# EAGLE board MotorControl (EAGLE 9.6.2), part 1 of 2
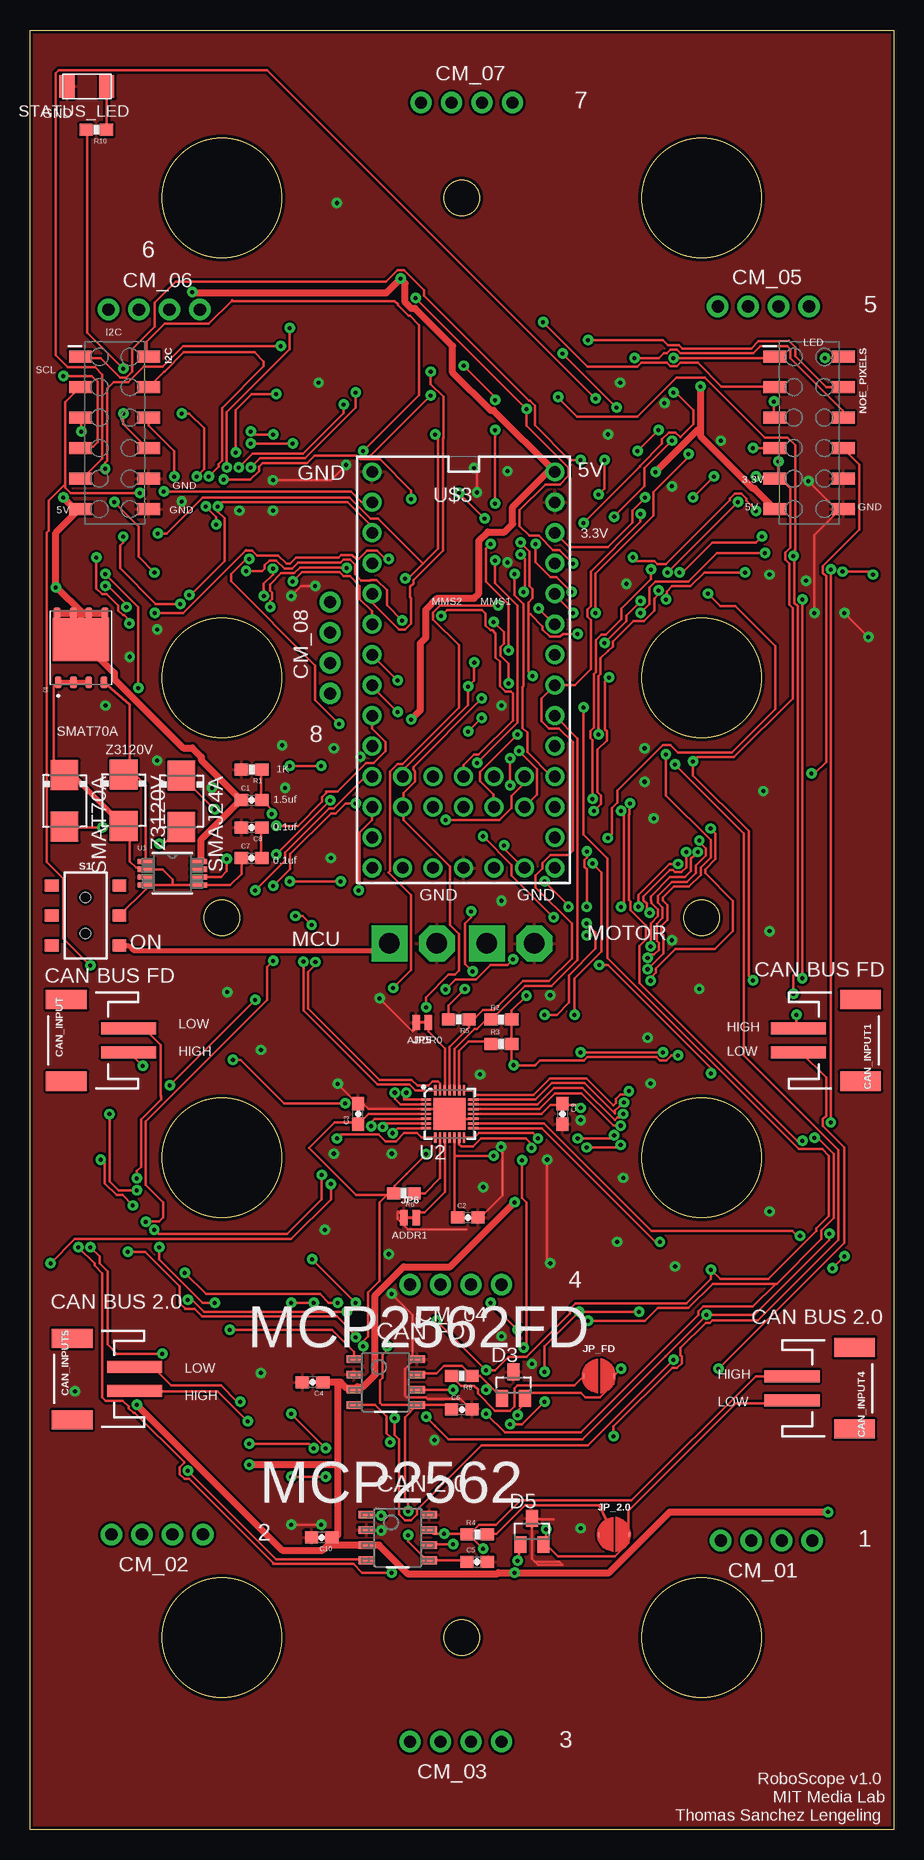
[diagram p0: board, top side]
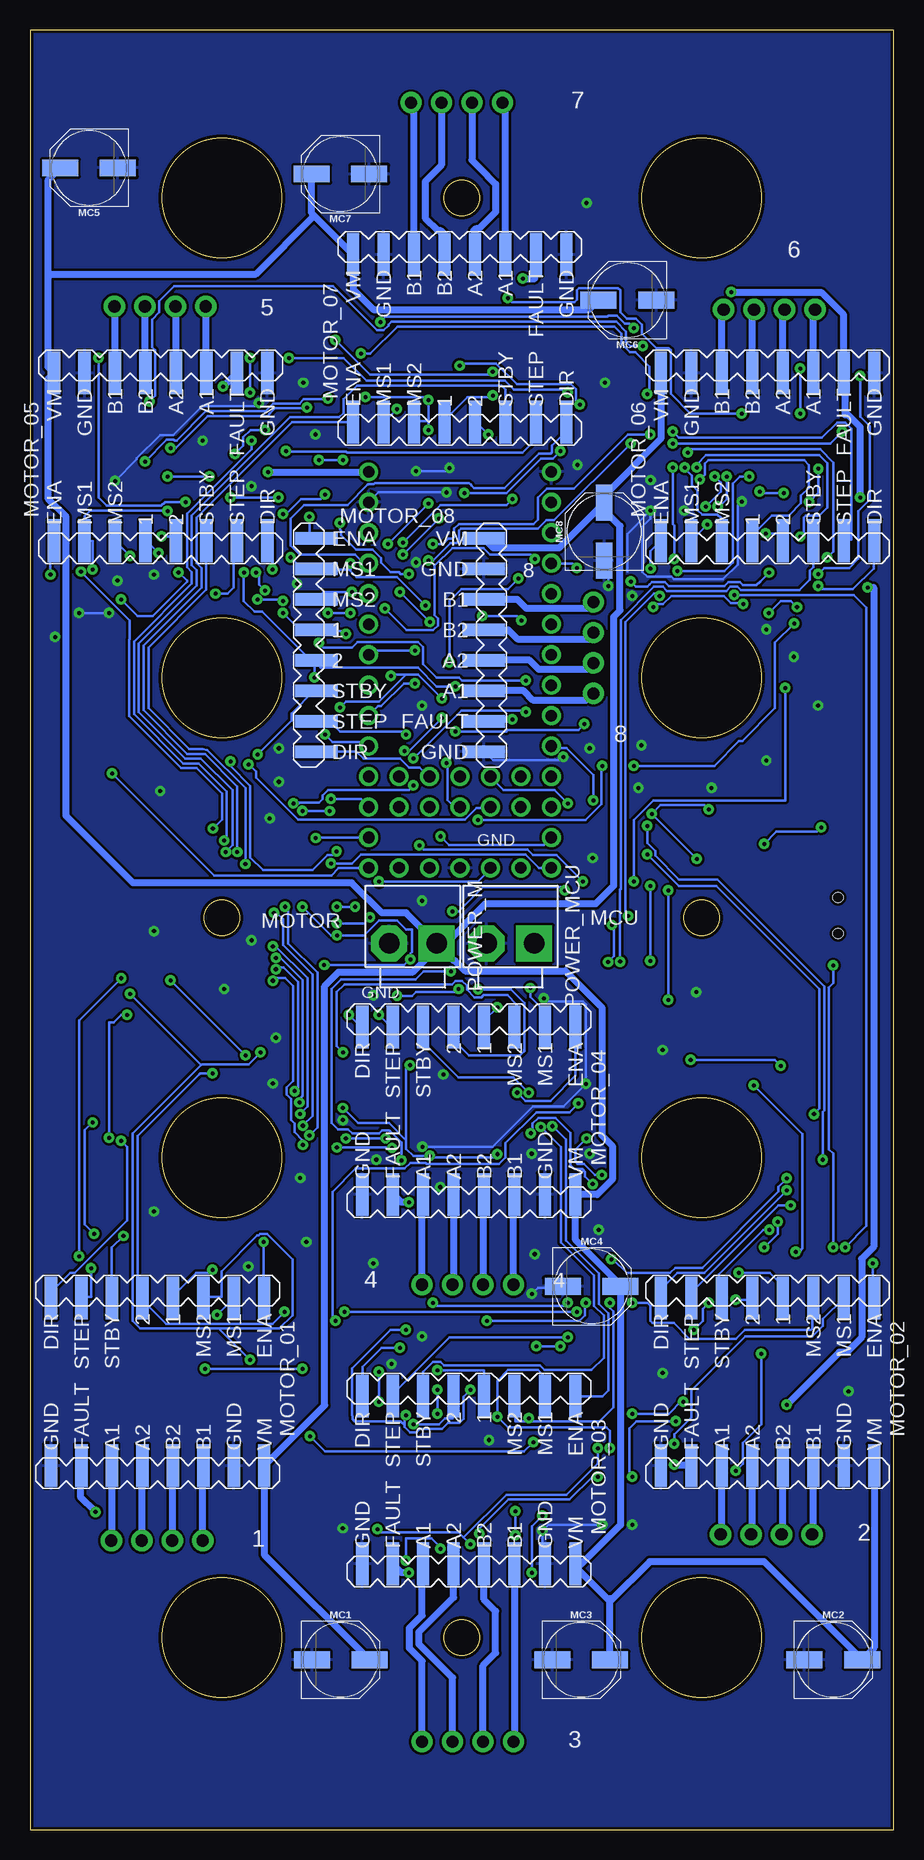
[diagram p1: board, bottom side, seen from below]

Size 72 x 150 mm. Coordinates in mm from the lower left corner, seen from the top.
Outline: 72,150 72,0 0,0 0,150 72,150
Outline: circle at 56,136 radius 5
Outline: circle at 56,96 radius 5
Outline: circle at 56,56 radius 5
Outline: circle at 56,16 radius 5
Outline: circle at 16,16 radius 5
Outline: circle at 16,56 radius 5
Outline: circle at 16,96 radius 5
Outline: circle at 16,136 radius 5
Outline: circle at 36,136 radius 1.5
Outline: circle at 16,76 radius 1.5
Outline: circle at 36,16 radius 1.5
Outline: circle at 56,76 radius 1.5
Copper layers (1*16): Top 0.035mm / dielectric 1.5mm / Bottom 0.035mm
Design rules "SparkFun": minimum track width 8mil, minimum drill 20mil, track to track 8mil, track to pad 8mil, pad to pad 8mil, via to via 8mil, smd to smd 8mil, copper to edge 10mil, drill to drill 8mil, minimum pad ring 12mil, minimum via ring 10mil, stop-mask expansion 4mil, vias tented up to drill 25mil, thermal gap 10mil
Net classes: 0 default: width 0.2 mm, clearance 0.2 mm; 1 gnd: width 0.2 mm, clearance 0.2 mm; 3 vcc: width 0.2 mm, clearance 0.2 mm; 4 vcc5: width 0.6 mm, clearance 0.2 mm

## Footprints (pad centres in the part's own frame; a part is rotated, then mirrored left to right if it is on the bottom)
0603-CAP = smd 1.1 x 1: 1 -0.85,0; 2 0.85,0
JST-2-SMD = smd 1 x 4.6: 1 -1,-3.7; 2 1,-3.7 | smd 1.6 x 3.4: NC1 -3.4,1.5; NC2 3.4,1.5
1X04-CLEANBIG = drill 1.016 pad 1.778: 1 -3.81,0; 2 -1.27,0; 3 1.27,0; 4 3.81,0
SOFL127P515X615X110-9N = smd 1.03 x 0.57: 1 -2.87,1.905; 2 -2.87,0.635; 3 -2.87,-0.635; 4 -2.87,-1.905; 5 2.87,-2; 6 2.87,-0.635; 7 2.87,0.635; 8 2.87,2 | smd 3.6 x 4.7: 9 0.675,0
SOT23 = smd 1 x 1.4: 1 -0.95,-1.1; 2 0.95,-1.1; 3 0,1.1
2X6_SMD = smd 1.02 x 1.9: 1 -6.35,-2.85; 2 -6.35,2.85; 3 -3.81,-2.85; 4 -3.81,2.85; 5 -1.27,-2.85; 6 -1.27,2.85; 7 1.27,-2.85; 8 1.27,2.85; 9 3.81,-2.85; 10 3.81,2.85; 11 6.35,-2.85; 12 6.35,2.85
SMT-JUMPER_2_NC_TRACE_NO-SILK = smd 0.635 x 1.27: 1 -0.508,0; 2 0.508,0
SMT-JUMPER_2_NO_NO-SILK_ROUND = smd 0.152 x 0.305: 1 -1.27,0; 2 1.27,0
PANASONIC_D = smd 3 x 1.4: + 2.4,0; - -2.4,0
MCP2562 = smd 1.27 x 0.635: CANH 2.625,0.635; CANL 2.625,-0.635; RXD -2.625,-1.905; STBY 2.625,1.905; TXD -2.625,1.905; VDD -2.625,-0.635; VIO 2.625,-1.905; VSS -2.625,0.635
DRV8880 = smd 3.556 x 1.016: 1 -6.985,1.27; 2 -6.985,-1.27; A1 6.985,-3.81; A2 6.985,-1.27; B1 6.985,3.81; B2 6.985,1.27; DIR -6.985,-8.89; ENA -6.985,8.89; FAULT 6.985,-6.35; GND_0 6.985,-8.89; GND_1 6.985,6.35; MS1 -6.985,6.35; MS2 -6.985,3.81; STBY -6.985,-3.81; STEP -6.985,-6.35; VM 6.985,8.89
B2P-VH = drill 1.7 pad 3 square: 1 -1.98,0 | drill 1.7 pad 3 octagon: 2 1.98,0
0603-RES = smd 1.1 x 1: 1 -0.85,0; 2 0.85,0
SWITCH_DPDT_SMD_AYZ0202 = smd 1 x 1.15: 1 -2.5,2.825; 2 0,2.825; 3 2.5,2.825; 4 -2.5,-2.825; 5 0,-2.825; 6 2.5,-2.825 | hole 0.85: 1.5,0; -1.5,0
DO214AA = smd 2.5 x 2.3: A 2.15,0; C -2.15,0
LED1206FAB = smd 1.27 x 1.905: 1 -1.651,0; 2 1.651,0
MSOP-8_MS = smd 1.397 x 0.432: 1 -2.21,0.975; 2 -2.21,0.325; 3 -2.21,-0.325; 4 -2.21,-0.975; 5 2.21,-0.975; 6 2.21,-0.325; 7 2.21,0.325; 8 2.21,0.975
QFN-28 = smd 0.85 x 0.2: 1 -1.975,1.2; 2 -1.975,0.8; 3 -1.975,0.4; 4 -1.975,0; 5 -1.975,-0.4; 6 -1.975,-0.8; 7 -1.975,-1.2; 15 1.975,-1.2; 16 1.975,-0.8; 17 1.975,-0.4; 18 1.975,0; 19 1.975,0.4; 20 1.975,0.8; 21 1.975,1.2 | smd 0.2 x 0.85: 8 -1.2,-1.975; 9 -0.8,-1.975; 10 -0.4,-1.975; 11 0,-1.975; 12 0.4,-1.975; 13 0.8,-1.975; 14 1.2,-1.975; 22 1.2,1.975; 23 0.8,1.975; 24 0.4,1.975; 25 0,1.975; 26 -0.4,1.975; 27 -0.8,1.975; 28 -1.2,1.975 | smd 2.65 x 2.65: 29 0,0
TEENSY_4.0_WITH_SMD_HEADER_PINS = drill 0.965: 0 -7.62,13.97; 1 -7.62,11.43; 2 -7.62,8.89; 3 -7.62,6.35; 3.3V 7.62,11.43; 3.3V1 -2.54,-16.51; 4 -7.62,3.81; 5 -7.62,1.27; 6 -7.62,-1.27; 7 -7.62,-3.81; 8 -7.62,-6.35; 9 -7.62,-8.89; 10 -7.62,-11.43; 11 -7.62,-13.97; 12 -7.62,-16.51; 13 7.62,-16.51; 14/A0 7.62,-13.97; 15/A1 7.62,-11.43; 16/A2 7.62,-8.89; 17/A3 7.62,-6.35; 18/A4 7.62,-3.81; 19/A5 7.62,-1.27; 20/A6 7.62,1.27; 21/A7 7.62,3.81; 22/A8 7.62,6.35; 23/A9 7.62,8.89; 24 5.08,-11.43; 25 5.08,-8.89; 26 2.54,-11.43; 27 2.54,-8.89; 28 0,-11.43; 29 0,-8.89; 30 -2.54,-11.43; 31 -2.54,-8.89; 32 -5.08,-11.43; 33 -5.08,-8.89; GND -7.62,16.51; GND1 0,-16.51; GND2 7.62,13.97; PGM 2.54,-16.51; RESET 5.08,-16.51; VBAT -5.08,-16.51; VIN 7.62,16.51

## Placement (x,y rotation side)
C1  1.5uf  [0603-CAP]  18.48,85.81 0 top
C2  0.1uF  [0603-CAP]  36.51,51.01 0 top
C3  0.1uF  [0603-CAP]  27.37,59.64 90 top
C4  0.1uf  [0603-CAP]  23.56,37.29 180 top
C5  0.1uf  [0603-CAP]  37.28,22.31 0 top
C6  0.1uf  [0603-CAP]  36.01,35.01 0 top
C7  0.1uf  [0603-CAP]  18.48,80.98 0 top
C8  0.1uf  [0603-CAP]  18.48,83.52 180 top
C9  0.1uF  [0603-CAP]  44.39,59.64 270 top
C10  0.1uf  [0603-CAP]  24.32,24.34 180 top
CAN_INPUT  [JST-2-SMD]  4.53,65.78 90 top
CAN_INPUT1  [JST-2-SMD]  67.76,65.78 270 top
CAN_INPUT4  [JST-2-SMD]  67.25,36.78 270 top
CAN_INPUT5  [JST-2-SMD]  5.02,37.55 90 top
CM_01  1X04_STRAIGHT  [1X04-CLEANBIG]  61.41,24.08 180 top
CM_02  1X04_STRAIGHT  [1X04-CLEANBIG]  10.61,24.59 180 top
CM_03  1X04_STRAIGHT  [1X04-CLEANBIG]  35.5,7.32 180 top
CM_04  1X04_STRAIGHT  [1X04-CLEANBIG]  35.5,45.42 180 top
CM_05  1X04_STRAIGHT  [1X04-CLEANBIG]  61.15,126.95 0 top
CM_06  1X04_STRAIGHT  [1X04-CLEANBIG]  10.35,126.7 0 top
CM_07  1X04_STRAIGHT  [1X04-CLEANBIG]  36.42,143.94 0 top
CM_08  1X04_STRAIGHT  [1X04-CLEANBIG]  25.03,98.51 90 top
D1  BSC010NE2LSI  [SOFL127P515X615X110-9N]  4.26,98.51 90 top
D3  PESD1CAN  [SOT23]  40.32,37.04 0 top
D5  PESD1CAN  [SOT23]  41.85,24.85 0 top
I2C  [2X6_SMD]  7.05,116.41 270 top
JP5  JUMPER-SMT_2_NC_TRACE_NO-SILK  [SMT-JUMPER_2_NC_TRACE_NO-SILK]  32.7,67.26 180 top
JP6  JUMPER-SMT_2_NC_TRACE_NO-SILK  [SMT-JUMPER_2_NC_TRACE_NO-SILK]  31.69,51.01 0 top
JP_2.0  JUMPER-SMT_2_NO_NO-SILK_ROUND  [SMT-JUMPER_2_NO_NO-SILK_ROUND]  48.71,24.59 0 top
JP_FD  JUMPER-SMT_2_NO_NO-SILK_ROUND  [SMT-JUMPER_2_NO_NO-SILK_ROUND]  47.44,37.8 0 top
MC1  100uF  [PANASONIC_D]  46.1,14.15 0 bottom
MC2  100uF  [PANASONIC_D]  5.02,14.15 0 bottom
MC3  100uF  [PANASONIC_D]  26.04,14.15 0 bottom
MC4  100uF  [PANASONIC_D]  25.16,45.28 0 bottom
MC5  100uF  [PANASONIC_D]  67.07,138.5 180 bottom
MC6  100uF  [PANASONIC_D]  22.19,127.49 180 bottom
MC7  100uF  [PANASONIC_D]  46.12,137.99 180 bottom
MC8  100uF  [PANASONIC_D]  24.12,108.19 90 bottom
MCP2562  MCP2562  [MCP2562]  30.67,24.34 0 top
MCP2562FD  MCP2562  [MCP2562]  29.66,37.29 0 top
MOTOR_01  DRV8880  [DRV8880]  61.36,37.31 270 bottom
MOTOR_02  DRV8880  [DRV8880]  10.5,37.31 270 bottom
MOTOR_03  DRV8880  [DRV8880]  35.41,29.13 270 bottom
MOTOR_04  DRV8880  [DRV8880]  35.41,59.91 270 bottom
MOTOR_05  DRV8880  [DRV8880]  61.1,114.43 90 bottom
MOTOR_06  DRV8880  [DRV8880]  10.5,114.43 90 bottom
MOTOR_07  DRV8880  [DRV8880]  36.17,124.3 90 bottom
MOTOR_08  DRV8880  [DRV8880]  41.14,98.73 0 bottom
NOE_PIXELS  [2X6_SMD]  64.96,116.41 270 top
POWER_M  B2P-VH  [B2P-VH]  40.07,73.87 180 bottom
POWER_MCU  B2P-VH  [B2P-VH]  31.94,73.87 180 bottom
R1  1K  [0603-RES]  18.48,88.35 180 top
R2  10K  [0603-RES]  39.31,67.52 0 top
R3  10K  [0603-RES]  39.31,65.49 0 top
R4  120Ohms  [0603-RES]  37.28,24.59 0 top
R5  10K  [0603-RES]  35.75,67.52 180 top
R6  10K  [0603-RES]  31.18,53.04 180 top
R8  120Ohms  [0603-RES]  36.01,37.8 180 top
R10  500  [0603-RES]  5.53,141.69 180 top
S1  [SWITCH_DPDT_SMD_AYZ0202]  4.63,76.18 270 top
SMAJ24A  S2M  [DO214AA]  12.63,85.72 270 top
SMAT70A  S2M  [DO214AA]  2.89,85.75 270 top
STATUS_LED  LEDFAB1206  [LED1206FAB]  4.74,145.29 180 top
U1  LTC4359CMS8PBF  [MSOP-8_MS]  11.88,79.71 0 top
U2  SX1509  [QFN-28]  34.99,59.64 0 top
U$3  TEENSY_4.0_WITH_SMD_HEADER_PINS  [TEENSY_4.0_WITH_SMD_HEADER_PINS]  36.15,96.66 0 top
Z3120V  S2M  [DO214AA]  7.81,85.81 270 top

## Library data of the parts
C1-C10 = SparkFun-Capacitors; PROD_ID: CAP-00810
CAN_INPUT CAN_INPUT1 CAN_INPUT4 CAN_INPUT5 = SparkFun-Connectors; PROD_ID: CONN-11443
CM_01-CM_08 = adafruit
D1 = BSC010NE2LSI; DESCRIPTION: N-Channel 25V 38A _Ta_, 100A _Tc_ 2.5W _Ta_, 96W _Tc_ Surface Mount PG-TDSON-8-7; DIGI-KEY_PART_NUMBER: BSC010NE2LSIATMA1CT-ND; DIGI-KEY_PURCHASE_URL: https://www.digikey.com/product-detail/en/infineon-technologies/BSC010NE2LSIATMA1/BSC010NE2LSIATMA1CT-ND/3196614?utm_source=snapeda&utm_medium=aggregator&utm_campaign=symbol; MF: Infineon; MP: BSC010NE2LSI; PACKAGE: PG-TDSON-8 Infineon
D3 D5 = diode
I2C NOE_PIXELS = SparkFun-Connectors
JP5 JP6 JP_2.0 JP_FD = SparkFun-Jumpers
MC1-MC8 = SparkFun-Capacitors; PROD_ID: CAP-12547
MCP2562 MCP2562FD = MCP2562
MOTOR_01-MOTOR_08 = STSPIN220
POWER_M POWER_MCU = con-JST VH
R1-R6 R8 R10 = SparkFun-Resistors; PROD_ID: RES-00824
S1 = SparkFun-Switches; PROD_ID: SWCH-08179; SF_SKU: COM-00597; SPICEPREFIX: X
SMAJ24A SMAT70A Z3120V = s2x_10; MF: Fairchild; MPN: S2M; OC_FARNELL: 9843876; OC_NEWARK: 58K9553
STATUS_LED = fab
U1 = LTC4359CMS8PBF; AVAILABILITY: Unavailable; DESCRIPTION: OR Controller N+1 ORing Controller N-Channel N:1 8-MSOP; MF: Linear Technology; MP: LTC4359CMS8#PBF; PACKAGE: MSOP-8 Linear Technology; PRICE: None
U2 = SparkFun-DigitalIC; PROD_ID: IC-11311
U$3 = Teensy4

## Nets
3.3V [vcc]: C2.1 C3.1 C5.1 C6.1 C9.1 I2C.9 MCP2562.VIO MCP2562FD.VIO NOE_PIXELS.9 R2.2 R3.2 R5.2 R6.2 U2.4 U2.12 U2.18 U$3.3.3V U$3.3.3V1
!RESET: R3.1 U2.23
CAN_H: CAN_INPUT1.1 CAN_INPUT.1 D3.1 MCP2562FD.CANH R8.1
CAN_H2: CAN_INPUT4.1 CAN_INPUT5.1 D5.1 MCP2562.CANH R4.1
CAN_L: CAN_INPUT1.2 CAN_INPUT.2 D3.2 JP_FD.2 MCP2562FD.CANL
CAN_L2: CAN_INPUT4.2 CAN_INPUT5.2 D5.2 JP_2.0.2 MCP2562.CANL
CAN_RX2: I2C.3 MCP2562.RXD U$3.0
CAN_RX3: MCP2562FD.RXD U$3.30
CAN_TX2: I2C.4 MCP2562.TXD U$3.1
CAN_TX3: MCP2562FD.TXD U$3.31
GND_MCU [gnd]: C2.2 C3.2 C4.2 C5.2 C6.2 C8.2 C9.2 C10.2 D3.3 D5.3 I2C.10 I2C.12 JP5.2 JP6.1 MC1.- MC2.- MC3.- MC4.- MC5.- MC6.- MC7.- MC8.- MCP2562.STBY MCP2562.VSS MCP2562FD.STBY MCP2562FD.VSS MOTOR_01.GND_0 MOTOR_01.GND_1 MOTOR_02.GND_0 MOTOR_02.GND_1 MOTOR_03.GND_0 MOTOR_03.GND_1 MOTOR_04.GND_0 MOTOR_04.GND_1 MOTOR_05.GND_0 MOTOR_05.GND_1 MOTOR_06.GND_0 MOTOR_06.GND_1 MOTOR_07.GND_0 MOTOR_07.GND_1 MOTOR_08.GND_0 MOTOR_08.GND_1 NOE_PIXELS.10 NOE_PIXELS.12 POWER_M.2 POWER_MCU.2 R1.2 STATUS_LED.2 U2.3 U2.17 U2.29 U$3.GND U$3.GND1 U$3.GND2
INT_01: I2C.5 U$3.28
INT_02: I2C.6 U$3.29
MA1_01 [vcc5]: CM_01.1 MOTOR_01.A1
MA1_02 [vcc5]: CM_02.1 MOTOR_02.A1
MA1_03 [vcc5]: CM_03.1 MOTOR_03.A1
MA1_04 [vcc5]: CM_04.1 MOTOR_04.A1
MA1_05 [vcc5]: CM_05.1 MOTOR_05.A1
MA1_06 [vcc5]: CM_06.1 MOTOR_06.A1
MA1_07 [vcc5]: CM_07.1 MOTOR_07.A1
MA1_08 [vcc5]: CM_08.1 MOTOR_08.A1
MA2_01 [vcc5]: CM_01.2 MOTOR_01.A2
MA2_02 [vcc5]: CM_02.2 MOTOR_02.A2
MA2_03 [vcc5]: CM_03.2 MOTOR_03.A2
MA2_04 [vcc5]: CM_04.2 MOTOR_04.A2
MA2_05 [vcc5]: CM_05.2 MOTOR_05.A2
MA2_06 [vcc5]: CM_06.2 MOTOR_06.A2
MA2_07 [vcc5]: CM_07.2 MOTOR_07.A2
MA2_08 [vcc5]: CM_08.2 MOTOR_08.A2
MB1_01 [vcc5]: CM_01.4 MOTOR_01.B1
MB1_02 [vcc5]: CM_02.4 MOTOR_02.B1
MB1_03 [vcc5]: CM_03.4 MOTOR_03.B1
MB1_04 [vcc5]: CM_04.4 MOTOR_04.B1
MB1_05 [vcc5]: CM_05.4 MOTOR_05.B1
MB1_06 [vcc5]: CM_06.4 MOTOR_06.B1
MB1_07 [vcc5]: CM_07.4 MOTOR_07.B1
MB1_08 [vcc]: CM_08.4 MOTOR_08.B1
MB2_01 [vcc5]: CM_01.3 MOTOR_01.B2
MB2_02 [vcc5]: CM_02.3 MOTOR_02.B2
MB2_03 [vcc5]: CM_03.3 MOTOR_03.B2
MB2_04 [vcc5]: CM_04.3 MOTOR_04.B2
MB2_05 [vcc5]: CM_05.3 MOTOR_05.B2
MB2_06 [vcc5]: CM_06.3 MOTOR_06.B2
MB2_07 [vcc5]: CM_07.3 MOTOR_07.B2
MB2_08 [vcc5]: CM_08.3 MOTOR_08.B2
MDIR_01: MOTOR_01.DIR U$3.6
MDIR_02: MOTOR_02.DIR U$3.8
MDIR_03: MOTOR_03.DIR U$3.10
MDIR_04: MOTOR_04.DIR U$3.12
MDIR_05: MOTOR_05.DIR U$3.15/A1
MDIR_06: MOTOR_06.DIR U$3.21/A7
MDIR_07: MOTOR_07.DIR U$3.23/A9
MDIR_08: MOTOR_08.DIR U$3.27
MMS1: MOTOR_01.MS1 MOTOR_02.MS1 MOTOR_03.MS1 MOTOR_04.MS1 MOTOR_05.MS1 MOTOR_06.MS1 MOTOR_07.MS1 MOTOR_08.MS1
MMS2: MOTOR_01.MS2 MOTOR_02.MS2 MOTOR_03.MS2 MOTOR_04.MS2 MOTOR_05.MS2 MOTOR_06.MS2 MOTOR_07.MS2 MOTOR_08.MS2
MSTEP_01: MOTOR_01.STEP U$3.5
MSTEP_02: MOTOR_02.STEP U$3.7
MSTEP_03: MOTOR_03.STEP U$3.9
MSTEP_04: MOTOR_04.STEP U$3.11
MSTEP_05: MOTOR_05.STEP U$3.14/A0
MSTEP_06: MOTOR_06.STEP U$3.20/A6
MSTEP_07: MOTOR_07.STEP U$3.22/A8
MSTEP_08: MOTOR_08.STEP U$3.26
N$1: JP_FD.1 R8.2
N$2: D1.4 U1.1 Z3120V.C
N$3: JP_2.0.1 R4.2
N$4: C1.2 R1.1 SMAJ24A.C U1.6
N$9: C7.2 C8.1
N$12: SMAJ24A.A SMAT70A.A
N$193: R10.1 STATUS_LED.1
NEOPIXEL_01: NOE_PIXELS.1 U$3.16/A2
NEOPIXEL_02: NOE_PIXELS.2 U$3.17/A3
NEOPIXEL_03: NOE_PIXELS.3 U$3.2
NEOPIXEL_04: NOE_PIXELS.4 U$3.3
NEOPIXEL_05: NOE_PIXELS.5 U$3.4
NEOPIXEL_06: NOE_PIXELS.6 U$3.24
NEOPIXEL_07: NOE_PIXELS.7 U$3.25
NEOPIXEL_08: NOE_PIXELS.8 U$3.13
OSCIO: U2.11
RESET: I2C.7 U$3.RESET
STATUS_PIN: I2C.8 R10.2
SX00_0: MOTOR_06.ENA U2.27
SX00_1: MOTOR_06.STBY U2.28
SX00_2: MOTOR_04.ENA U2.1
SX00_3: MOTOR_04.STBY U2.2
SX00_4: MOTOR_03.ENA U2.5
SX00_5: MOTOR_03.STBY U2.6
SX00_6: MOTOR_02.ENA U2.7
SX00_7: MOTOR_02.STBY U2.8
SX00_8: MOTOR_05.ENA U2.13
SX00_9: MOTOR_05.STBY U2.14
SX00_10: MOTOR_01.ENA U2.15
SX00_11: MOTOR_01.STBY U2.16
SX00_12: MOTOR_07.ENA U2.19
SX00_13: MOTOR_07.STBY U2.20
SX00_14: MOTOR_08.ENA U2.21
SX00_15: MOTOR_08.STBY U2.22
SX00_!INT: R6.1 U2.9
SX00_ADDR0: JP5.1 U2.26
SX00_ADDR1: JP6.2 U2.10
SX00_SCL: I2C.1 R5.1 U2.25 U$3.19/A5
SX00_SDA: I2C.2 R2.1 U2.24 U$3.18/A4
TRQ1: MOTOR_01.1 MOTOR_02.1 MOTOR_03.1 MOTOR_04.1 MOTOR_05.1 MOTOR_06.1 MOTOR_07.1 MOTOR_08.1 U$3.32
TRQ2: MOTOR_01.2 MOTOR_02.2 MOTOR_03.2 MOTOR_04.2 MOTOR_05.2 MOTOR_06.2 MOTOR_07.2 MOTOR_08.2 U$3.33
VBAT: U$3.VBAT
VCC_5V [vcc5]: C1.1 C4.1 C10.1 D1.5 D1.6 D1.7 D1.8 D1.9 I2C.11 MCP2562.VDD MCP2562FD.VDD MOTOR_01.FAULT MOTOR_02.FAULT MOTOR_03.FAULT MOTOR_04.FAULT MOTOR_05.FAULT MOTOR_06.FAULT MOTOR_07.FAULT MOTOR_08.FAULT NOE_PIXELS.11 U1.8 U$3.VIN
VCC_M [vcc5]: MC1.+ MC2.+ MC3.+ MC4.+ MC5.+ MC6.+ MC7.+ MC8.+ MOTOR_01.VM MOTOR_02.VM MOTOR_03.VM MOTOR_04.VM MOTOR_05.VM MOTOR_06.VM MOTOR_07.VM MOTOR_08.VM POWER_M.1
VCC_MCU [vcc]: POWER_MCU.1 S1.3
VCC_SWITCH [vcc]: C7.1 D1.1 D1.2 D1.3 S1.2 SMAT70A.C U1.2 U1.4 U1.5 Z3120V.A